# Altium PCB BOC1_06.PcbDoc (part 3 of 4)
Units mil, origin at the board's own origin, x right, y up, seen from the top; angles counter-clockwise.
Board outline 7900 x 6500 mil, 2 copper layers (Top Layer, Bottom Layer); 312 components, 413 nets, 1710 pads, 368 vias.
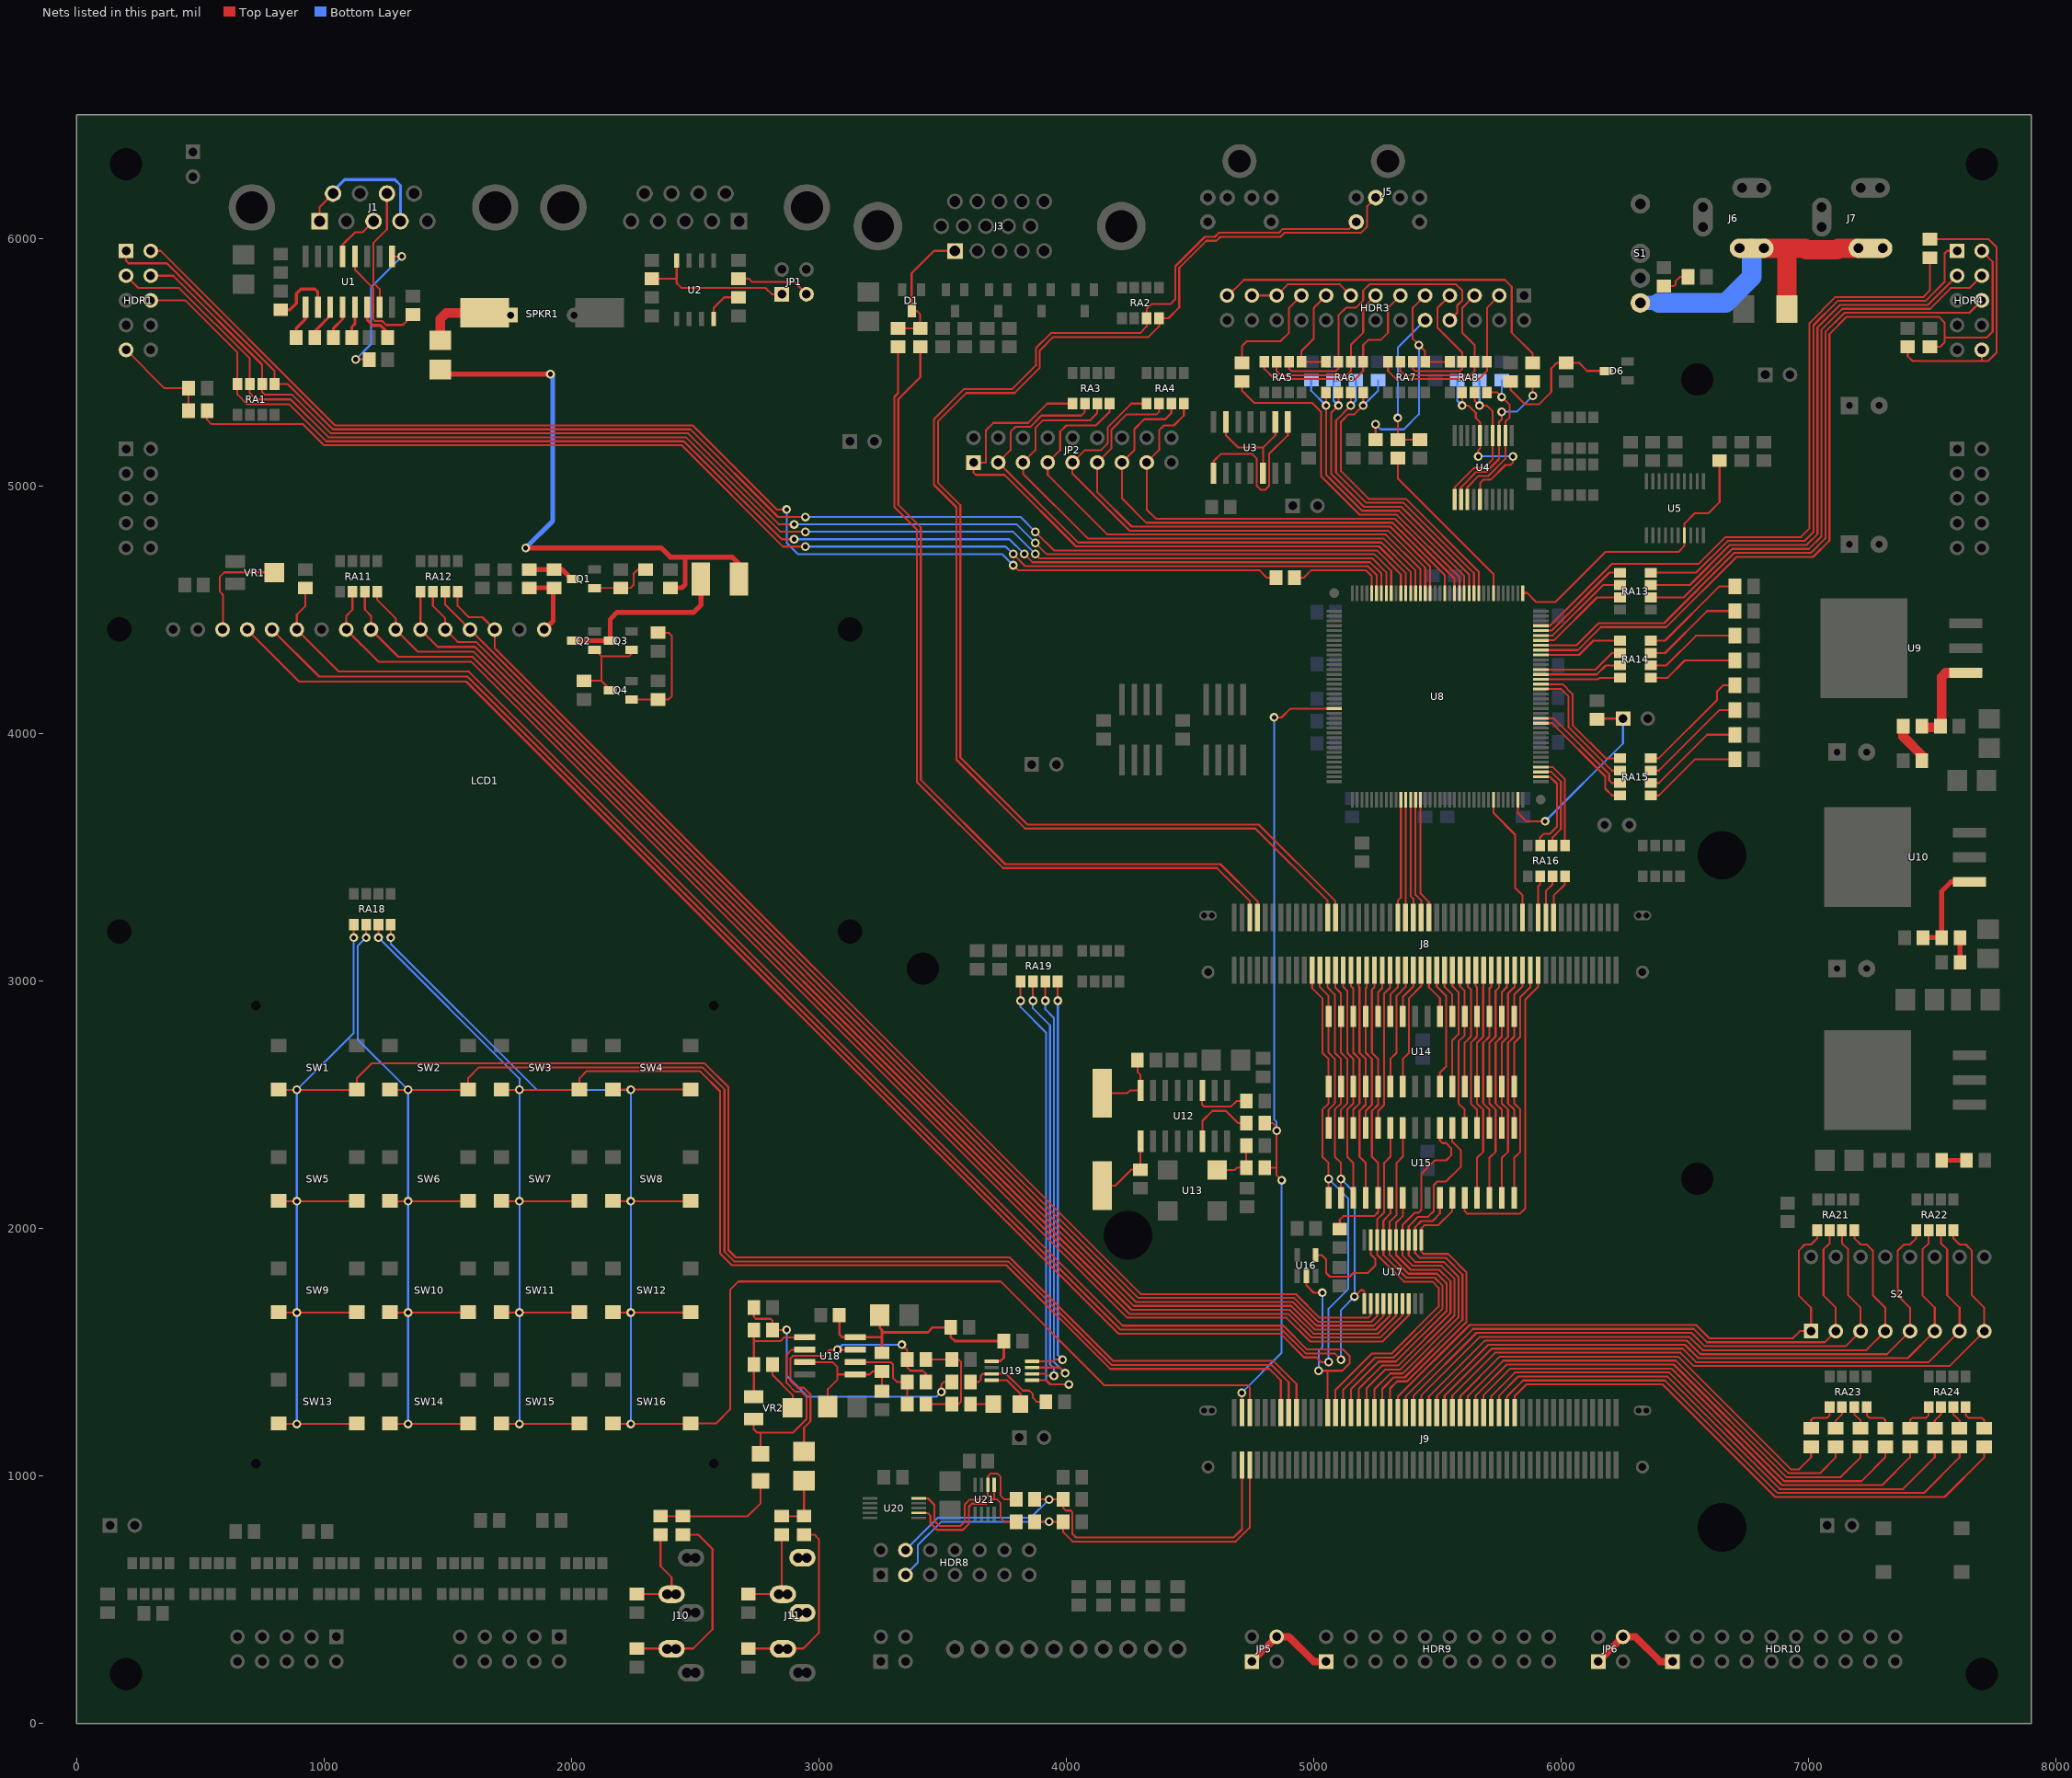
[diagram p3: the nets of this part, all layers, seen from the top]

## Via types
v1: diameter 35.43, hole 19.68, Top Layer to Bottom Layer, 194 vias
v2: diameter 35.43, hole 19.68, Top Layer to Bottom Layer, tented both sides, 169 vias
v3: diameter 50, hole 27.56, Top Layer to Bottom Layer, 5 vias

## Nets (pads, with @x,y where several pads share a name; then routed paths per layer and width w, separated by ;. In a path a pad name is that pad's centre, name@x,y a point inside that pad or via, vN(x,y) a via of type N, cw(c..) or ccw(c..) an arc to the next point about the centre after c; other vN are vias at no path point) (continued)
LCD_D1: LCD1.8 RA11.2 U17.8 | length 5740
  Top Layer w7.87: RA11.2@1115,4573 1115,4500 1090,4475 LCD1.8@1090,4420 1220,4290 1595,4290 4246,1639 4890.08,1639 4986.08,1543 5278,1543 5383.98,1648.98 U17.8@5383.98,1696.06
LCD_D2: LCD1.9 RA11.3 U17.7 | length 5601.5
  Top Layer w7.87: RA11.3@1165,4573 1165,4500 1190,4475 LCD1.9@1190,4420 1300,4310 1600,4310 4255,1655 4896.35,1655 4992.35,1559 5269,1559 5358.39,1648.39 U17.7@5358.39,1696.06
LCD_D3: LCD1.10 RA11.4 U17.6 | length 5483.7
  Top Layer w7.87: RA11.4@1215,4573 1215,4540 1290,4465 LCD1.10@1290,4420 1380,4330 1605,4330 4264,1671 4902.63,1671 4998.63,1575 5260,1575 5332.8,1647.8 U17.6@5332.8,1696.06
LCD_D4: LCD1.11 RA12.1 U17.5 | length 5314.2
  Top Layer w7.87: RA12.1@1390,4573 LCD1.11@1390,4420 1460,4350 1610,4350 4273,1687 4908.9,1687 5004.9,1591 5251,1591 5307.2,1647.2 U17.5@5307.2,1696.06
LCD_D5: LCD1.12 RA12.2 U17.4 | length 5196.4
  Top Layer w7.87: RA12.2@1440,4573 1440,4515 1490,4465 LCD1.12@1490,4420 1540,4370 1615,4370 4282,1703 4915.17,1703 5011.17,1607 5242,1607 5281.61,1646.61 U17.4@5281.61,1696.06
LCD_D6: LCD1.13 RA12.3 U17.3 | length 5078.6
  Top Layer w7.87: RA12.3@1490,4573 1490,4520 4291,1719 4921.44,1719 5017.44,1623 5233,1623 5256.02,1646.02 U17.3@5256.02,1696.06
LCD_D7: LCD1.14 RA12.4 U17.2 | length 5034.6
  Top Layer w7.87: RA12.4@1540,4573 1540,4515 1585,4470 1640,4470 LCD1.14@1690,4420 1690,4345 4300,1735 4927.71,1735 5023.71,1639 5220,1639 5230.43,1649.43 U17.2@5230.43,1696.06
LCD_E: J9.26 LCD1.6 R29.1 U16.2 | length 6425.3
  Top Layer w7.87: R29.1@925,4587.6 925,4515 890,4480 LCD1.6@890,4420 1060,4250 1585,4250 4228,1607 4877.54,1607 4973.54,1511 5119,1511 5145,1485 5145,1455 5115,1425 v2(5020,1425) ; U16.2@4970,1807.68 4970,1770 5000,1740 v1(5035,1740) ; J9.26@5056.3,1256.3 5056.3,1425
  Bottom Layer w7.87: v2(5020,1425) 5020,1505 5035,1520 v1(5035,1740)
LCD_EN: U16.4 U17.19 | length 440.3
  Top Layer w7.87: U16.4@5007.4,1892.32 5032.68,1892.32 5050,1875 5050,1820 5065,1805 5145,1805 5160,1820 5219,1820 5249,1850 5249,1876 5230.43,1894.57 U17.19@5230.43,1953.94
LED0: J9.60 LED0.1 | length 1801
  Top Layer w7.87: J9.60@5591.73,1256.3 5591.73,1321.73 5752,1482 6473,1482 6928,1027 6962,1027 7010,1075 LED0.1@7010,1117.6
LED0#: LED0.2 RA23.1 | length 148.9
  Top Layer w7.87: LED0.2@7010,1192.4 7010,1225 7020,1235 7075,1235 7085,1245 RA23.1@7085,1278
LED1: J9.62 LED1.1 | length 1870.4
  Top Layer w7.87: J9.62@5623.23,1256.3 5623.23,1323.23 5766,1466 6464,1466 6919,1011 7046,1011 7110,1075 LED1.1@7110,1117.6
LED1#: LED1.2 RA23.2 | length 96
  Top Layer w7.87: LED1.2@7110,1192.4 7110,1224 7135,1249 RA23.2@7135,1278
LED2: J9.64 LED2.1 | length 1939.8
  Top Layer w7.87: J9.64@5654.72,1256.3 5654.72,1324.72 5780,1450 6455,1450 6910,995 7130,995 7210,1075 LED2.1@7210,1117.6
LED2#: LED2.2 RA23.3 | length 96
  Top Layer w7.87: RA23.3@7185,1278 7185,1249 7210,1224 LED2.2@7210,1192.4
LED3: J9.66 LED3.1 | length 2009.2
  Top Layer w7.87: J9.66@5686.22,1256.3 5686.22,1326.22 5794,1434 6446,1434 6901,979 7214,979 7310,1075 LED3.1@7310,1117.6
LED3#: LED3.2 RA23.4 | length 148.9
  Top Layer w7.87: RA23.4@7235,1278 7235,1245 7245,1235 7300,1235 7310,1225 LED3.2@7310,1192.4
LED4: J9.68 LED4.1 | length 2075.6
  Top Layer w7.87: J9.68@5717.72,1256.3 5717.72,1322.72 5813,1418 6437,1418 6892,963 7298,963 7410,1075 LED4.1@7410,1117.6
LED4#: LED4.2 RA24.1 | length 148.9
  Top Layer w7.87: LED4.2@7410,1192.4 7410,1225 7420,1235 7475,1235 7485,1245 RA24.1@7485,1278
LED5: J9.70 LED5.1 | length 2145
  Top Layer w7.87: J9.70@5749.21,1256.3 5749.21,1324.21 5827,1402 6428,1402 6883,947 7382,947 7510,1075 LED5.1@7510,1117.6
LED5#: LED5.2 RA24.2 | length 96
  Top Layer w7.87: LED5.2@7510,1192.4 7510,1224 7535,1249 RA24.2@7535,1278
LED6: J9.72 LED6.1 | length 2211.5
  Top Layer w7.87: J9.72@5780.71,1256.3 5780.71,1320.71 5846,1386 6419,1386 6874,931 7466,931 7610,1075 LED6.1@7610,1117.6
LED6#: LED6.2 RA24.3 | length 96
  Top Layer w7.87: RA24.3@7585,1278 7585,1249 7610,1224 LED6.2@7610,1192.4
LED7: J9.74 LED7.1 | length 2280.8
  Top Layer w7.87: J9.74@5812.21,1256.3 5812.2,1322.21 5860,1370 6410,1370 6865,915 7550,915 7710,1075 LED7.1@7710,1117.6
LED7#: LED7.2 RA24.4 | length 148.9
  Top Layer w7.87: RA24.4@7635,1278 7635,1245 7645,1235 7700,1235 7710,1225 LED7.2@7710,1192.4
MASTER: R8.2 U8.103 | length 5097.2
  Top Layer w7.87: R8.2@527.4,5305 527.4,5267.6 545,5250 915,5250 1000,5165 2445,5165 2855,4755 v1(2945,4755) ; v1(3785,4725) 3834,4676 5219,4676 5253.94,4641.06 U8.103@5253.94,4567.32
  Bottom Layer w7.87: v1(2945,4755) 3755,4755 v1(3785,4725)
MASTER#: HDR1.9 R7.2 R8.1 | length 406.8
  Top Layer w7.87: HDR1.9@200,5550 355,5395 R7.2@452.6,5395 R8.1@452.6,5305
MASTER_MODE: HDR1.6 RA1.8 U8.102 | length 5609.4
  Top Layer w7.87: HDR1.6@300,5750 440,5750 650,5540 650,5370 690,5330 860,5330 1009,5181 2454,5181 2850,4785 v1(2900,4785) ; v1(3830,4725) 3863,4692 5228,4692 5273.62,4646.38 U8.102@5273.62,4567.32
  Bottom Layer w7.87: v1(2900,4785) 3770,4785 v1(3830,4725)
MASTER_TCK: HDR1.3 RA1.7 U8.101 | length 5756
  Top Layer w7.87: HDR1.3@200,5850 250,5800 415,5800 700,5515 700,5375 725,5350 865,5350 1018,5197 2463,5197 2845,4815 v1(2945,4815) ; v1(3875,4725) 3892,4708 5237,4708 5293.31,4651.69 U8.101@5293.31,4567.32
  Bottom Layer w7.87: v1(2945,4815) 3785,4815 v1(3875,4725)
MASTER_TDI: HDR1.1 RA1.5 U8.98 | length 5823.7
  Top Layer w7.87: HDR1.1@200,5950 200,5910 210,5900 365,5900 800,5465 RA1.5@800,5412 853,5412 1036,5229 2481,5229 2835,4875 v1(2945,4875) ; v1(3875,4815) 3950,4740 5255,4740 5352.36,4642.64 U8.98@5352.36,4567.32
  Bottom Layer w7.87: v1(2945,4875) 3815,4875 v1(3875,4815)
MASTER_TDO: HDR1.2 R36.1 | length 5173.4
  Top Layer w7.87: HDR1.2@300,5950 340,5950 1045,5245 2490,5245 2830,4905 v1(2870,4905) ; v1(3785,4680) 3805,4660 4780,4660 4810,4630 R36.1@4847.6,4630
  Bottom Layer w7.87: v1(2870,4905) 2870,4770 2915,4725 3740,4725 v1(3785,4680)
MASTER_TDO#: R36.2 U8.104 | length 402.7
  Top Layer w7.87: R36.2@4922.4,4630 4960,4630 4990,4660 5210,4660 5234.25,4635.75 U8.104@5234.25,4567.32
MASTER_TMS: HDR1.4 RA1.6 U8.100 | length 5661.3
  Top Layer w7.87: HDR1.4@300,5850 390,5850 750,5490 750,5380 760,5370 870,5370 1027,5213 2472,5213 2840,4845 v1(2900,4845) ; v1(3875,4770) 3921,4724 5246,4724 5312.99,4657.01 U8.100@5312.99,4567.32
  Bottom Layer w7.87: v1(2900,4845) 3800,4845 v1(3875,4770)
MODE: C85.1 RA6.4 U8.82 | length 1308.8
  Top Layer w7.87: RA6.4@5200,5378 v2(5200,5325) 5165,5290 5140,5290 5110,5260 5110,5060 5222,4948 5372,4948 5667.32,4652.68 U8.82@5667.32,4567.32
  Bottom Layer w7.87: v2(5200,5325) 5260,5385 C85.1@5260,5427.6
MODE_1: JP2.1 RA3.1 U8.97 | length 2611
  Top Layer w7.87: RA3.1@4025,5333 3923,5333 3845,5255 3705,5255 3675,5225 3675,5095 JP2.1@3625,5095 3625,5055 3635,5045 3750,5045 4039,4756 5264,4756 5372.05,4647.95 U8.97@5372.05,4567.32
MODE_2: JP2.3 RA3.2 U8.96 | length 2447.5
  Top Layer w7.87: RA3.2@4075,5333 4075,5300 4060,5285 3900,5285 3854,5239 3794,5239 3775,5220 3775,5145 JP2.3@3725,5095 4048,4772 5273,4772 5391.73,4653.27 U8.96@5391.73,4567.32
MODE_3: JP2.5 RA3.3 U8.95 | length 2358.4
  Top Layer w7.87: RA3.3@4125,5333 4125,5295 4095,5265 3905,5265 3875,5235 3875,5145 JP2.5@3825,5095 3825,5050 4087,4788 5282,4788 5411.42,4658.58 U8.95@5411.42,4567.32
MODE_4: JP2.7 RA3.4 U8.94 | length 2222.4
  Top Layer w7.87: RA3.4@4175,5333 4175,5300 4120,5245 4000,5245 3975,5220 3975,5145 JP2.7@3925,5095 3925,5045 4166,4804 5291,4804 5431.1,4663.9 U8.94@5431.1,4567.32
MODE_5: JP2.9 RA4.1 U8.93 | length 2167.1
  Top Layer w7.87: RA4.1@4325,5333 4263,5333 4167,5237 4167,5172 4140,5145 4075,5145 JP2.9@4025,5095 4025,5050 4255,4820 5300,4820 5450.79,4669.21 U8.93@5450.79,4567.32
MODE_6: JP2.11 RA4.2 U8.92 | length 2109
  Top Layer w7.87: RA4.2@4375,5333 4375,5300 4365,5290 4245,5290 4183,5228 4183,5153 JP2.11@4125,5095 4125,4975 4264,4836 5309,4836 5470.47,4674.53 U8.92@5470.47,4567.32
MODE_7: JP2.13 RA4.3 U8.89 | length 2021.5
  Top Layer w7.87: RA4.3@4425,5333 4425,5295 4400,5270 4315,5270 4275,5230 4275,5145 JP2.13@4225,5095 4225,4950 4323,4852 5318,4852 5529.53,4640.47 U8.89@5529.53,4567.32
MODE_8: JP2.15 RA4.4 U8.87 | length 1931.8
  Top Layer w7.87: RA4.4@4475,5333 4475,5285 4435,5245 4395,5245 4375,5225 4375,5145 JP2.15@4325,5095 4325,4905 4362,4868 5327,4868 5568.9,4626.1 U8.87@5568.9,4567.32
MOUSECLOCK: J5.5 J8.26 RA2.3 | length 5414.9
  Top Layer w7.87: J8.26@5056.3,3256.3 5056.3,3323.7 4764,3616 3834,3616 3556,3894 3556,4914 3465,5005 3465,5270 3587,5392 3782,5392 3877,5487 3877,5557 3938,5618 4298,5618 4325,5645 RA2.3@4325,5678 4325,5715 4345.07,5735.07 4421.07,5735.07 4440.5,5754.5 4440.5,5887.84 4559.66,6007 4600.27,6007 4616.27,6023 4859,6023 4874.75,6038.75 5143.87,6038.75 J5.5@5172.05,6066.93
MOUSEDATA: J5.1 J8.28 RA2.4 | length 5564.2
  Top Layer w7.87: J8.28@5087.79,3256.3 5087.79,3322.21 4778,3632 3843,3632 3572,3903 3572,4923 3481,5014 3481,5261 3596,5376 3791,5376 3893,5478 3893,5548 3947,5602 4332,5602 4375,5645 RA2.4@4375,5678 4413,5678 4456.24,5721.24 4456.24,5881.31 4565.93,5991 4606.54,5991 4622.54,6007 4865.27,6007 4881.27,6023 5190,6023 5216,6049 5216,6130.57 J5.1@5250.79,6165.35
N_TCK: C88.1 RA6.1 U8.85 | length 1257.2
  Top Layer w7.87: RA6.1@5050,5378 5050,5045 5195,4900 5345,4900 5608.27,4636.73 U8.85@5608.27,4567.32
  Bottom Layer w7.87: C88.1@4990,5427.6 4990,5385 v2(5050,5325)
N_TDI: C86.1 RA6.3 U8.83 | length 1265.3
  Top Layer w7.87: RA6.3@5150,5378 v2(5150,5325) 5090,5265 5090,5055 5213,4932 5363,4932 5647.64,4647.36 U8.83@5647.64,4567.32
  Bottom Layer w7.87: v2(5150,5325) 5170,5345 C86.1@5170,5427.6
N_TDO: R16.2 U8.86 | length 1444.7
  Top Layer w7.87: R16.2@4710,5422.6 4710,5385 4759,5336 4994,5336 5030,5300 5030,5040 5186,4884 5336,4884 5588.58,4631.42 U8.86@5588.58,4567.32
N_TDO#: HDR3.10 R16.1 | length 451.1
  Top Layer w7.87: R16.1@4710,5497.4 4710,5565 4730,5585 4865,5585 4900,5620 4900,5720 HDR3.10@4950,5770
N_TMS: C87.1 RA6.2 U8.84 | length 1253
  Top Layer w7.87: RA6.2@5100,5378 v2(5100,5325) 5070,5295 5070,5050 5204,4916 5354,4916 5627.95,4642.05 U8.84@5627.95,4567.32
  Bottom Layer w7.87: C87.1@5080,5427.6 5080,5345 v2(5100,5325)
N_TMS#: HDR3.17 RA5.6 RA6.7 | length 1178.6
  Top Layer w7.87: RA5.6@4900,5502 4900,5474 4910,5464 5090,5464 5100,5474 5100,5690 5130,5720 5170,5720 5200,5750 5200,5790 5225,5815 5575,5815 5600,5790 5600,5750 5580,5730 5580,5700 HDR3.17@5550,5670
NetC3_2: C3.2 U1.2 | length 273.6
  Top Layer w11.81: C3.2@825.1,5712.6 862.6,5712.6 888,5738 888,5777 907,5796 963,5796 975,5784 U1.2@975,5722.64
NetC6_1: C6.1 U1.1 | length 138.1
  Top Layer w11.81: C6.1@887.6,5600 887.6,5637.6 925,5675 U1.1@925,5722.64
NetC6_2: C6.2 U1.3 | length 148.6
  Top Layer w11.81: C6.2@962.4,5600 962.4,5625.1 1025,5687.7 U1.3@1025,5722.64
NetC7_1: C7.1 U1.4 | length 138.1
  Top Layer w11.81: C7.1@1037.6,5600 1037.6,5636.6 1075,5674 U1.4@1075,5722.64
NetC7_2: C7.2 U1.5 | length 127.9
  Top Layer w11.81: C7.2@1112.4,5600 1112.4,5642.4 1125,5655 U1.5@1125,5722.64
NetC8_1: C8.1 U1.6 | length 174.9
  Top Layer w11.81: U1.6@1175,5722.64 1175,5671 1197,5649 1227.95,5649 1257.4,5619.54 C8.1@1257.4,5600
NetC9_1: C9.1 C18.1 L1.2 | length 2315.7
  Top Layer w19.68: C9.1@1470,5470.95 1488.94,5452 v2(1915,5452) ; v2@1815.57,4750 2362.57,4750 2399.57,4713 2648.57,4713 2678.35,4683.23 L1.2@2678.35,4626.57 ; C18.1@2401.48,4588.6 2446.17,4588.6 2459.57,4602 2459.57,4703
  Bottom Layer w19.68: v2@1815.57,4750 1924.6,4859.02 1924.6,5442.4 v2(1915,5452)
  other v2: 1815,4750
NetC9_2: C9.2 SPKR1.1 SPKR1.1A | length 276.6
  Top Layer w39.37: C9.2@1470,5589.06 1470,5675 1494,5700 SPKR1.1@1650,5700
NetC28_1: C28.1 CR1.1 U12.16 | length 287.1
  Top Layer w7.87: CR1.1@4145,2547.01 4247.01,2547.01 4257.36,2557.36 U12.16@4300,2557.36 4300,2620 4287.6,2632.4 C28.1@4287.6,2680
NetC31_1: C31.1 CR1.2 U12.1 | length 296.9
  Top Layer w7.87: CR1.2@4145,2172.99 4197.99,2172.99 4262.4,2237.4 C31.1@4300,2237.4 U12.1@4300,2352.64
NetC36_1: C36.1 R60.2 R67.1 | length 1144
  Top Layer w7.87: C36.1@2737.6,1680 2737.6,1642.4 2745,1635 2805,1635 2812.4,1627.6 R60.2@2812.4,1590 v1(2870,1590) ; v1(3495,1340) 3495,1370 3505,1380 R67.1@3537.6,1380
  Bottom Layer w7.87: v1(2870,1590) 2870,1405 2955,1320 3475,1320 v1(3495,1340)
NetC37_2: C37.2 C38.1 C42.1 R61.2 R63.2 U18.8 U19.1 | length 1079.8
  Top Layer w9.84: C37.2@3082.4,1650 3082.4,1572.6 3095,1560 3255,1560 ; C38.1@3245.95,1650 3245.95,1599.05 3255,1590 R63.2@3255,1497.4 ; 3255,1580 3440,1580 3460,1600 R61.2@3532.6,1600 3532.6,1562.4 3550,1545 C42.1@3747.6,1545 3747.6,1477.6 3733.39,1463.39 U19.1@3698.31,1463.39
NetC39_1: C39.1 R63.1 R65.2 U18.3 U18.5 | length 582.2
  Top Layer w7.87: U18.3@2942.64,1460 3055,1460 3075,1440 3075,1390 3035.95,1350.95 C39.1@3035.95,1280 ; 3075,1410 3205,1410 3217.6,1422.6 R63.1@3255,1422.6 R65.2@3255,1342.4
NetC40_1: C40.1 R66.2 U18.6 | length 365.6
  Top Layer w7.87: U18.6@3147.36,1460 3290,1460 3300,1450 3300,1395 3315,1380 C40.1@3357.6,1380 R66.2@3357.6,1290
NetC40_2: C40.2 C46.1 R64.1 U18.7 | length 1199.7
  Top Layer w7.87: C46.1@2940,1099.05 2940,1195 2966,1221 2966,1329 2939,1356 2914,1356 2885,1385 2885,1475 2895,1485 3020,1485 3045,1510 U18.7@3147.36,1510 ; v1(3335,1530) 3357.6,1507.4 3357.6,1437.4 3370,1425 3420,1425 3432.4,1412.6 C40.2@3432.4,1380
  Bottom Layer w7.87: v1(3075,1510) 3095,1530 v1(3335,1530)
NetC41_1: C41.1 R64.2 R66.1 R68.1 | length 453.5
  Top Layer w7.87: R66.1@3432.4,1290 3565,1290 3575,1300 3575,1460 3565,1470 R64.2@3432.4,1470
NetC43_1: C43.1 R68.2 | length 92.5
  Top Layer w7.87: R68.2@3612.4,1290 C43.1@3704.88,1290
NetC43_2: C43.2 U19.4 | length 180.8
  Top Layer w7.87: U19.4@3698.31,1386.61 3759.39,1386.61 3815.12,1330.88 C43.2@3815.12,1290
NetC44_1: C44.1 R67.2 U19.3 | length 382.6
  Top Layer w7.87: R67.2@3612.4,1380 3645,1380 3655,1390 3655,1405 3662.2,1412.2 3756.8,1412.2 3824,1345 3850,1345 3865,1330 3865,1315 3880,1300 C44.1@3917.6,1300
NetC45_1: C45.1 R71.2 R72.2 | length 516.7
  Top Layer w7.87: R71.2@2360,837.4 2712.4,837.4 2765,890 C45.1@2765,979.88
NetC45_2: C45.2 U18.2 VR2.CCW | length 757.6
  Top Layer w7.87: VR2.CCW@2736.26,1229.72 2736.26,1188.74 2750,1175 2895,1175 2950,1230 2950,1320 2930,1340 2905,1340 2869,1376 2869,1489 2890,1510 U18.2@2942.64,1510 ; C45.2@2765,1090.12 2765,1175
NetC46_2: C46.2 R73.2 R74.2 | length 233.5
  Top Layer w7.87: R73.2@2850,837.4 R74.2@2940,837.4 C46.2@2940,980.94
NetC50_1: C50.1 J10.4 J10.4A J10.4B R71.1 | length 398.4
  Top Layer w7.87: C50.1@2265,522.4 2404.72,522.4 2404.72,590.28 2360,635 R71.1@2360,762.6
NetC51_1: C51.1 J10.2 J10.2A J10.2B R72.1 | length 806.1
  Top Layer w7.87: C51.1@2265,302.4 2492.6,302.4 2570,380 2570,705 2512.4,762.6 R72.1@2450,762.6
NetC52_1: C52.1 J11.4 J11.4A J11.4B R73.1 | length 375.2
  Top Layer w7.87: C52.1@2715,522.4 2850,522.4 R73.1@2850,762.6
NetC53_1: C53.1 J11.2 J11.2A J11.2B R74.1 | length 758.2
  Top Layer w7.87: C53.1@2715,302.4 2937.4,302.4 3000,365 3000,745 2982.4,762.6 R74.1@2940,762.6
NetD6_3: D6.3 R17.2 R19.1 | length 582.6
  Top Layer w7.87: R17.2@5795,5422.6 5795,5390 5855,5330 5910,5330 5960,5380 5960,5475 5982.4,5497.4 6072.6,5497.4 6105,5465 D6.3@6181.69,5465
NetJ1_1: J1.1 J1.4 J1.6 | length 590.3
  Top Layer w7.87: J1.1@981.89,6070.08 981.89,6127.36 J1.6@1036.42,6181.89
  Bottom Layer w11.81: J1.6@1036.42,6181.89 1036.42,6191.42 1083,6238 1286,6238 1309.05,6214.95 J1.4@1309.05,6070.08
NetJ11_3: J11.3 J11.3A J11.3B
NetJ11_5: J11.5 J11.5A J11.5B
NetJP1_1: JP1.1 R2.2 U2.8 | length 634.9
  Top Layer w7.87: R2.2@2325,5837.6 2425,5837.6 ; U2.8@2425,5911.22 2425,5820 2445,5800 2785,5800 2810,5775 JP1.1@2850,5775
NetJP1_3: JP1.3 R3.1 | length 300.9
  Top Layer w7.87: R3.1@2675,5837.6 2717.4,5837.6 2730,5825 2900,5825 JP1.3@2950,5775
NetL1_1: L1.1 Q2.3 Q3.3 | length 733.4
  Top Layer w19.68: Q2.3@2006.69,4375 Q3.3@2156.69,4375 2156.69,4461.69 2185,4490 2495,4490 2523.23,4518.23 L1.1@2523.23,4625
NetLCD1_3: LCD1.3 VR1.W | length 446.8
  Top Layer w7.87: LCD1.3@591.53,4419.9 591.53,4561 578.23,4574.31 578.23,4632.65 596.85,4651.28 VR1.W@799.06,4651.28
NetLCD1_16: LCD1.16 R32.1 R33.1 | length 283.2
  Top Layer w19.68: R32.1@1826.47,4588.6 1926.47,4588.6 1926.47,4454.84 LCD1.16@1891.54,4419.9
NetLED8_1: LED8.1 R5.2 | length 120.7
  Top Layer w7.87: R5.2@6415,5807.6 6455.6,5807.6 6462,5814 6462,5827 6480,5845 LED8.1@6512.6,5845
NetQ1_1: Q1.1 R34.2 R35.2 | length 265.5
  Top Layer w7.87: Q1.1@2093.31,4587.6 2239.17,4588.6 2251.57,4601 2251.57,4646 2268.97,4663.4 R35.2@2301.48,4663.4
NetQ1_3: Q1.3 R32.2 R33.2 | length 184.1
  Top Layer w19.68: R32.2@1830,4662.4 R33.2@1930,4662.4 1961.17,4663.4 Q1.3@1998.57,4626
NetQ2_1: Q2.1 Q3.1 Q4.3 R38.2 | length 387.1
  Top Layer w7.87: R38.2@2051.47,4213.4 2120.87,4213.4 ; Q2.1@2094.88,4338.6 2120.87,4312.61 ; Q4.3@2158.27,4176 2120.87,4213.4 ; Q3.1@2244.88,4324.31 2233.19,4312.61 2120.87,4312.61 ; 2120.87,4213.4 2120.87,4312.61
NetQ4_1: Q4.1 R37.2 R39.1 | length 472
  Top Layer w7.87: Q4.1@2243.31,4137.6 2392.6,4137.6 2405,4150 2405,4395 2392.6,4407.4 R37.2@2350,4407.4
NetR1_2: R1.2 U1.12 | length 471.3
  Top Layer w7.87: U1.12@1125,5927.36 1125,5873.73 1198.62,5800.11 1198.62,5675.38 1207,5667 1235,5667 1251,5651 1318.5,5651 R1.2@1360.1,5692.6
NetR4_2: R4.2 U2.4 | length 162.6
  Top Layer w7.87: U2.4@2575,5675 2575,5720 2617.4,5762.4 R4.2@2675,5762.4
NetR9_2: R9.2 U1.9 | length 584.8
  Top Layer w7.87: v2(1128,5512) R9.2@1180.5,5512 ; U1.9@1275,5927.36 v2(1314.64,5927.36)
  Bottom Layer w7.87: v2(1128,5512) 1190,5574 1190,5802.73 v2(1314.64,5927.36)
NetR41_1: R41.1 R42.2 U9.1 | length 377.5
  Top Layer w39.37: R41.1@7457.4,4024.9 R42.2@7532.6,4024.9 ; R42.2@7537.6,4029.9 7537.6,4227.6 7555,4245 U9.1@7635,4245
NetR41_2: R41.2 R43.1 | length 173.1
  Top Layer w39.37: R41.2@7382.6,4030 7382.6,3987.4 7460,3910 7460,3892.6 R43.1@7457.4,3890
NetR47_2: R47.2 R48.1 U10.1 | length 390.6
  Top Layer w19.68: R47.2@7462.4,3175.1 7537.6,3175.1 7537.6,3362.6 7575,3400 U10.1@7650,3400
NetR48_2: R48.2 R49.2 | length 100
  Top Layer w19.68: R49.2@7612.4,3075 R48.2@7612.4,3175
NetR51_1: R51.1 U12.11 | length 247
  Top Layer w7.87: U12.11@4549,2557.36 4549,2500 4556,2493 4667,2493 4689.1,2515.1 R51.1@4726.6,2515.1
NetR52_1: R52.1 U12.6 | length 297.2
  Top Layer w7.87: U12.6@4550,2352.64 4550,2435 4590,2475 4645,2475 4695,2425 R52.1@4727.6,2425
NetR53_1: R53.1 R54.1 U13.3 | length 210.3
  Top Layer w7.87: U13.3@4610,2236.1 4680.1,2236.1 4689.1,2245.1 4726.6,2245.1 R53.1@4726.6,2335.1
NetR57_2: R57.2 R58.1 | length 100.2
  Top Layer w19.68: R57.2@7537.4,2275.1 R58.1@7637.6,2275.1
NetR60_1: R60.1 R62.2 U18.1 VR2.CW | length 481.3
  Top Layer w7.87: VR2.CW@2737.6,1320 R60.1@2737.6,1590 ; 2737.6,1545 2845,1545 2860,1560 U18.1@2942.64,1560
NetR62_1: R62.1 VR2.W | length 208.7
  Top Layer w7.87: R62.1@2812.4,1450 2812.4,1407.6 2893.74,1326.26 VR2.W@2893.74,1275
NetRA19_1: RA19.1 U19.5 | length 1907.9
  Top Layer w7.87: v1(3815,2920) RA19.1@3815,2998 ; U19.5@3861.69,1386.61 3918.39,1386.61 3935,1370 v1(4010,1370)
  Bottom Layer w7.87: v1(3815,2920) 3815,2895 3918.5,2791.5 3918.5,1386.5 3935,1370 v1(4010,1370)
NetRA19_2: RA19.2 U19.6 | length 1729.5
  Top Layer w7.87: U19.6@3861.69,1412.2 3917.8,1412.2 3925,1405 v1(3950,1405) ; v1@3865,2910 RA19.2@3865,2998
  Bottom Layer w7.87: v1(3865,2920) 3865,2890 3934.25,2820.75 3934.25,1450.75 3950,1435 v1(3950,1405)
NetRA19_3: RA19.3 U19.7 | length 1758.9
  Top Layer w7.87: U19.7@3861.69,1437.8 3972.2,1437.8 v1(3995,1415) ; v1(3915,2920) RA19.3@3915,2998
  Bottom Layer w7.87: v1(3915,2920) 3915,2885 3950,2850 3950,1460 v1(3995,1415)
NetRA19_4: RA19.4 U19.8 | length 1662.3
  Top Layer w7.87: U19.8@3861.69,1463.39 3948.39,1463.39 3955,1470 v1(3985,1470) ; v1(3965,2920) RA19.4@3965,2998
  Bottom Layer w7.87: v1(3965,2920) 3965.75,2919.25 3965.75,1489.25 v1(3985,1470)
NetU3_1: U3.1 U3.8 | length 705.9
  Top Layer w7.87: U3.8@4595,5051.65 4595,5100 4625,5130 4750,5130 4770,5110 4770,5000 4785,4985 4805,4985 4820,5000 4820,5130 4895,5205 U3.1@4895,5258.35
NetU3_2: U3.2 U3.6 U3.12 | length 451.5
  Top Layer w7.87: U3.6@4645,5258.35 4645,5205 4695,5155 4795,5155 ; U3.12@4795,5051.65 4795,5155 ; U3.2@4845,5258.35 4845,5205 4795,5155
NEXUS_TCK: J8.82 RA16.3 | length 177.8
  Top Layer w7.87: J8.82@5938.19,3256.3 5938.19,3363.19 5965,3390 RA16.3@5965,3423
NEXUS_TCK#: RA16.6 U8.39 | length 370.9
  Top Layer w7.87: U8.39@5917.32,3844.88 5960.12,3844.88 5999,3806 5999,3614 5965,3580 RA16.6@5965,3547
NEXUS_TDI: J8.84 RA16.4 | length 185.5
  Top Layer w7.87: J8.84@5969.69,3256.3 5969.69,3344.69 6015,3390 RA16.4@6015,3423
NEXUS_TDI#: RA16.5 U8.40 | length 386.2
  Top Layer w7.87: U8.40@5917.32,3864.57 5965.43,3864.57 6015,3815 RA16.5@6015,3547
NEXUS_TDO: J8.76 U8.30 | length 525
  Top Layer w7.87: U8.30@5726.38,3732.68 5726.38,3678.62 5814,3591 5814,3376 5843.7,3346.3 J8.76@5843.7,3256.3
NEXUS_TMS: J8.80 RA16.2 | length 170.1
  Top Layer w7.87: J8.80@5906.69,3256.3 5906.69,3381.69 5915,3390 RA16.2@5915,3423
NEXUS_TMS#: RA16.7 U8.38 | length 370.2
  Top Layer w7.87: RA16.7@5915,3547 5915,3580 5930,3595 5955,3595 5983,3623 5983,3797 5954.8,3825.2 U8.38@5917.32,3825.2
PAR_TCK: C82.1 RA8.3 U4.4 U4.11 | length 669.5
  Top Layer w7.87: U4.11@5569.84,4946.06 5569.84,4994.84 5648,5073 5688,5073 5723.39,5108.39 5723.39,5301.61 5700,5325 v2(5670,5325) 5650,5345 RA8.3@5650,5378
  Bottom Layer w7.87: v2(5670,5325) C82.1@5670,5427.6
PAR_TDI: C81.1 RA8.4 U4.2 U4.13 | length 656.5
  Top Layer w7.87: U4.13@5621.02,4946.06 5621.02,4996.02 5666,5041 5706,5041 5774.57,5109.57 5774.57,5259.57 5792,5277 5792,5328 5742,5378 RA8.4@5700,5378
  Bottom Layer w7.87: v2(5760,5360) C81.1@5760,5427.6
PAR_TDO: R18.2 U4.3 U4.12 | length 655.1
  Top Layer w7.87: U4.12@5595.43,4946.06 5595.43,4995.43 5657,5057 5697,5057 5748.98,5108.98 5748.98,5258.98 5760,5270 v2(5760,5300) ; v2(5885,5365) R18.2@5885,5422.6
  Bottom Layer w7.87: v2(5760,5300) 5820,5300 v2(5885,5365)
PAR_TDO#: HDR3.13 R18.1 | length 1532.6
  Top Layer w7.87: HDR3.13@4650,5765 4718,5833 5772,5833 5800,5805 5800,5620 5885,5535 R18.1@5885,5497.4
PAR_TMS: C83.1 RA8.2 U4.6 U4.15 | length 814.7
  Top Layer w7.87: RA8.2@5600,5378 v2(5600,5325) 5625,5325 5655,5295 5655,5275 5672.2,5257.8 5672.2,5152.2 5665,5145 v2(5665,5120) ; U4.15@5672.2,4946.06 5672.2,5012.2 5685,5025 5715,5025 5775,5085 5795,5085 5805,5095 v2(5805,5120)
  Bottom Layer w7.87: C83.1@5580,5427.6 5580,5345 v2(5600,5325) ; v2(5665,5120) v2(5805,5120)
PARALLEL: R23.2 U8.79 | length 705.3
  Top Layer w7.87: R23.2@5340,5112.6 5340,5030 5726.38,4643.62 U8.79@5726.38,4567.32
PARALLEL#: HDR3.18 R23.1 R24.1 | length 613.2
  Top Layer w7.87: v2@5340,5270 R23.1@5340,5187.4 R24.1@5430,5187.4
  Bottom Layer w7.87: v2(5340,5275) 5340,5560 HDR3.18@5450,5670
PROGRAM: R25.2 U5.7 U8.73 | length 1195.8
  Top Layer w7.87: U8.73@5844.49,4567.32 5862.68,4567.32 5899,4531 5976,4531 6179,4734 6474,4734 6498.39,4758.39 6498.39,4848.39 6540,4890 6595,4890 6640,4935 R25.2@6640,5100.2
PU0: HDR3.2 RA7.8 RA8.5 | length 790
  Top Layer w7.87: RA7.8@5300,5502 5300,5465 5333,5432 5667,5432 5700,5465 5700,5720 HDR3.2@5750,5770
PU1: HDR3.3 RA7.7 RA8.6 | length 697.5
  Top Layer w7.87: RA7.7@5350,5502 5350,5465 5367,5448 5633,5448 5650,5465 5650,5570 5600,5620 5600,5720 HDR3.3@5650,5770
PU2: HDR3.4 RA7.6 RA8.7 | length 594.4
  Top Layer w7.87: RA7.6@5400,5502 5400,5474 5410,5464 5590,5464 5600,5474 5600,5540 5500,5640 5500,5720 HDR3.4@5550,5770
PU3: HDR3.5 R22.1 RA7.5 RA8.8 | length 961
  Top Layer w7.87: R22.1@5250,5187.4 v2(5250,5250) ; HDR3.5@5450,5770 5400,5720 5400,5595 5450,5545 RA7.5@5450,5502 RA8.8@5550,5502
  Bottom Layer w7.87: v2(5250,5250) 5271,5229 5364,5229 5425,5290 v2(5425,5570)
PU4: HDR3.6 RA5.8 RA6.5 | length 855.5
  Top Layer w7.87: RA5.8@4800,5502 4800,5474 4842,5432 5167,5432 5200,5465 5200,5570 5220,5590 5270,5590 5300,5620 5300,5720 HDR3.6@5350,5770
PU5: HDR3.7 RA5.7 RA6.6 | length 697.5
  Top Layer w7.87: RA5.7@4850,5502 4850,5465 4867,5448 5133,5448 5150,5465 5150,5570 5200,5620 5200,5720 HDR3.7@5250,5770
PU6#: HDR3.8 HDR3.11 HDR3.12 | length 437.3
  Top Layer w7.87: HDR3.12@4750,5770 HDR3.11@4850,5770 4895,5815 5105,5815 HDR3.8@5150,5770
PU7: HDR3.9 RA5.5 RA6.8 | length 409.4
  Top Layer w7.87: RA6.8@5050,5502 RA5.5@4950,5502 4950,5545 5000,5595 5000,5720 HDR3.9@5050,5770
PWR_IN: D7.2 J6.1 J6.1A J6.1B J7.1 J7.1A J7.1B S1.3 | length 1241
  Top Layer w78.74: J6.1B@6819.21,5960.63 6984.37,5960.63 6990,5955 7115,5955 7120.63,5960.63 J7.1A@7200.79,5960.63 ; D7.2@6912.5,5715 6912.5,5960.63
  Bottom Layer w59.06: S1.3@6320,5740 6395,5740
  Bottom Layer w78.74: 6395,5740 6665,5740 6770,5845 J6.1@6770,5960.63
PWR_USER_1: HDR9.1 JP5.1 JP5.4 | length 382.8
  Top Layer w29.53: JP5.1@4750,250 JP5.4@4850,350 4900,350 5000,250 HDR9.1@5050,250
PWR_USER_2: HDR10.1 JP6.1 JP6.4 | length 382.8
  Top Layer w29.53: JP6.1@6150,250 JP6.4@6250,350 6300,350 6400,250 HDR10.1@6450,250
RAM0_DATA0: J9.42 U15.11 U17.11 | length 1236.7
  Top Layer w7.87: J9.42@5308.27,1256.3 5308.27,1353.27 5337,1382 5377,1382 5617,1622 5617,1823 5543,1897 5443,1897 5435.16,1904.84 5435.16,2001.16 5447,2013 5503,2013 5560,2070 U15.11@5560,2123.27
RAM0_DATA1: J9.40 U15.10 U17.12 | length 1236.4
  Top Layer w7.87: J9.40@5276.77,1256.3 5276.77,1351.77 5323,1398 5368,1398 5601,1631 5601,1814 5534,1881 5429,1881 5409.57,1900.43 5409.57,2004.57 5435,2030 5480,2030 5510,2060 U15.10@5510,2123.27
RAM0_DATA2: J9.38 U15.22 U17.13 | length 1616.9
  Top Layer w7.87: J9.38@5245.28,1256.3 5245.28,1350.28 5309,1414 5359,1414 5585,1640 5585,1805 5525,1865 5410,1865 5383.98,1891.02 5383.98,2008.98 5422,2047 5462,2047 5485,2070 5485,2175 5500,2190 5535,2190 5595,2250 5595,2315 5560,2350 U15.22@5560,2406.73
RAM0_DATA3: J9.36 U15.23 U17.14 | length 1631.3
  Top Layer w7.87: J9.36@5213.78,1256.3 5213.78,1353.78 5290,1430 5350,1430 5569,1649 5569,1796 5516,1849 5401,1849 5358.39,1891.61 5358.39,2013.39 5409,2064 5424,2064 5435,2075 5435,2220 5490,2275 5535,2275 5555,2295 5555,2325 5535,2345 5520,2345 5510,2355 U15.23@5510,2406.73
RAM0_DATA4: J9.34 U15.7 U17.15 | length 1228.4
  Top Layer w7.87: J9.34@5182.28,1256.3 5182.28,1352.28 5276,1446 5341,1446 5553,1658 5553,1787 5507,1833 5392,1833 5332.8,1892.2 5332.8,2022.8 5360,2050 U15.7@5360,2123.27
RAM0_DATA5: J9.32 U15.26 U17.16 | length 1535.8
  Top Layer w7.87: J9.32@5150.79,1256.3 5150.79,1350.79 5262,1462 5332,1462 5537,1667 5537,1778 5498,1817 5383,1817 5307.2,1892.8 5307.2,2027.2 5335,2055 5335,2265 5360,2290 U15.26@5360,2406.73
RAM0_DATA6: J9.30 U15.6 U17.17 | length 1255.6
  Top Layer w7.87: J9.30@5119.29,1256.3 5119.29,1349.29 5248,1478 5323,1478 5521,1676 5521,1769 5489,1801 5374,1801 5281.61,1893.39 5281.61,2031.61 5310,2060 U15.6@5310,2123.27
RAM0_DATA7: J9.28 U15.27 U17.18 | length 1563
  Top Layer w7.87: J9.28@5087.79,1256.3 5087.79,1347.79 5234,1494 5314,1494 5505,1685 5505,1760 5480,1785 5365,1785 5256.02,1893.98 5256.02,2036.02 5285,2065 5285,2265 5310,2290 U15.27@5310,2406.73
RAM0_OE: J8.41 U15.28 | length 657
  Top Layer w7.87: U15.28@5260,2406.73 5260,2475 5285,2500 5285,2950 5308.27,2973.27 J8.41@5308.27,3043.7
RAM0_WE: J8.79 U15.12 | length 1295.2
  Top Layer w7.87: U15.12@5610,2123.27 5610,2070 5620,2060 5834,2060 5855,2081 5855,2925 5906.69,2976.69 J8.79@5906.69,3043.7
RAM1_DATA0: J8.45 U14.6 | length 495.8
  Top Layer w7.87: U14.6@5310,2573.27 5310,2685 5335,2710 5335,2940 5371.26,2976.26 J8.45@5371.26,3043.7
RAM1_DATA1: J8.49 U14.7 | length 501.2
  Top Layer w7.87: U14.7@5360,2573.27 5360,2685 5385,2710 5385,2930 5434.25,2979.25 J8.49@5434.25,3043.7
RAM1_DATA2: J8.53 U14.10 | length 496.4
  Top Layer w7.87: J8.53@5497.24,3043.7 5497.24,2977.76 5535,2940 5535,2655 5510,2630 U14.10@5510,2573.27
RAM1_DATA3: J8.57 U14.11 | length 491
  Top Layer w7.87: U14.11@5560,2573.27 5560,2760 5585,2785 5585,2955 5560.24,2979.76 J8.57@5560.24,3043.7
RAM1_DATA4: J8.55 U14.22 | length 199.9
  Top Layer w7.87: J8.55@5528.74,3043.7 5528.74,2976.26 5560,2945 U14.22@5560,2856.73
RAM1_DATA5: J8.51 U14.23 | length 205.3
  Top Layer w7.87: J8.51@5465.75,3043.7 5465.75,2974.25 5510,2930 U14.23@5510,2856.73
RAM1_DATA6: J8.47 U14.26 | length 204.7
  Top Layer w7.87: U14.26@5360,2856.73 5360,2935 5402.76,2977.76 J8.47@5402.76,3043.7
RAM1_DATA7: J8.43 U14.27 | length 199.3
  Top Layer w7.87: U14.27@5310,2856.73 5310,2945 5339.76,2974.76 J8.43@5339.76,3043.7
RAM1_OE: J8.39 U14.28 | length 193.9
  Top Layer w7.87: U14.28@5260,2856.73 5260,2955 5276.77,2971.77 J8.39@5276.77,3043.7
RAM1_WE: J8.61 U14.12 | length 485.7
  Top Layer w7.87: U14.12@5610,2573.27 5610,2750 5635,2775 5635,2965 5623.23,2976.77 J8.61@5623.23,3043.7
RAM_ADDR0: J8.21 LCD1.4 U14.1 U15.1 | length 7371.1
  Top Layer w7.87: LCD1.4@690,4420 900,4210 1575,4210 4210,1575 4865,1575 4961,1479 5011,1479 5030,1460 v2(5060,1460) ; J8.21@4993.31,3043.7 4993.31,2971.69 5035,2930 5035,2710 5060,2685 5060,2505 5035,2480 5035,2290 5060,2265 U15.1@5060,2123.27
  Bottom Layer w7.87: v2(5060,1460) 5060,1676 5140,1756 5140,2120 v2(5060,2200)
RAM_ADDR1: J8.25 LCD1.5 U14.2 U15.2 U17.1 | length 7382.2
  Top Layer w7.87: LCD1.5@790,4420 980,4230 1580,4230 4219,1591 4871.27,1591 4967.27,1495 5085,1495 v2(5110,1470) ; J8.25@5056.3,3043.7 5056.3,2973.7 5085,2945 5085,2710 5110,2685 5110,2505 5085,2480 5085,2290 5110,2265 U15.2@5110,2123.27 ; v2(5165,1725) 5190,1750 5200,1750 5204.84,1745.16 U17.1@5204.84,1696.06
  Bottom Layer w7.87: v2(5110,1470) 5110,1670 v2(5165,1725) 5165,2145 v2(5110,2200)
RAM_ADDR2: J8.29 U14.3 U15.3 | length 958
  Top Layer w7.87: J8.29@5119.29,3043.7 5119.29,2975.71 5135,2960 5135,2710 5160,2685 5160,2505 5135,2480 5135,2290 5160,2265 U15.3@5160,2123.27
RAM_ADDR3: J8.33 U14.4 U15.4 | length 952.6
  Top Layer w7.87: J8.33@5182.28,3043.7 5182.28,2977.72 5185,2975 5185,2710 5210,2685 5210,2500 5185,2475 5185,2290 5210,2265 U15.4@5210,2123.27
RAM_ADDR4: J8.65 U14.13 U15.13 | length 952
  Top Layer w7.87: U15.13@5660,2123.27 5660,2285 5685,2310 5685,2480 5660,2505 5660,2750 5685,2775 5685,2975 5686.22,2976.22 J8.65@5686.22,3043.7
RAM_ADDR5: J8.69 U14.14 U15.14 | length 957.4
  Top Layer w7.87: U15.14@5710,2123.27 5710,2285 5735,2310 5735,2480 5710,2505 5710,2750 5735,2775 5735,2960 5749.21,2974.21 J8.69@5749.21,3043.7
RAM_ADDR6: J8.73 U14.15 U15.15 | length 962.8
  Top Layer w7.87: U15.15@5760,2123.27 5760,2285 5785,2310 5785,2480 5760,2505 5760,2750 5785,2775 5785,2950 5812.2,2977.21 J8.73@5812.21,3043.7
RAM_ADDR7: J8.77 U14.16 U15.16 | length 968.1
  Top Layer w7.87: U15.16@5810,2123.27 5810,2285 5835,2310 5835,2480 5810,2505 5810,2750 5835,2775 5835,2935 5875.2,2975.2 J8.77@5875.2,3043.7
RAM_ADDR8: J8.75 U14.17 U15.17 | length 671.6
  Top Layer w7.87: U15.17@5810,2406.73 5810,2480 5785,2505 5785,2750 5810,2775 5810,2945 5843.7,2978.7 J8.75@5843.7,3043.7
RAM_ADDR9: J8.71 U14.18 U15.18 | length 666.3
  Top Layer w7.87: U15.18@5760,2406.73 5760,2480 5735,2505 5735,2750 5760,2775 5760,2955 5780.71,2975.71 J8.71@5780.71,3043.7
RAM_ADDR10: J8.67 U14.19 U15.19 | length 660.9
  Top Layer w7.87: U15.19@5710,2406.73 5710,2480 5685,2505 5685,2750 5710,2775 5710,2970 5717.72,2977.72 J8.67@5717.72,3043.7
RAM_ADDR11: J8.63 U14.20 U15.20 | length 659.9
  Top Layer w7.87: J8.63@5654.72,3043.7 5654.72,2980.28 5660,2975 5660,2775 5635,2750 5635,2505 5660,2480 U15.20@5660,2406.73
RAM_ADDR12: J8.59 U14.21 U15.21 | length 665.2
  Top Layer w7.87: J8.59@5591.73,3043.7 5591.73,2978.27 5610,2960 5610,2780 5585,2755 5585,2505 5610,2480 U15.21@5610,2406.73
RAM_ADDR13: J8.35 U14.29 U15.29 | length 659.2
  Top Layer w7.87: U15.29@5210,2406.73 5210,2475 5235,2500 5235,2685 5210,2710 5210,2970 5213.78,2973.78 J8.35@5213.78,3043.7
RAM_ADDR14: J8.31 U14.30 U15.30 | length 661.5
  Top Layer w7.87: J8.31@5150.79,3043.7 5150.79,2979.21 5160,2970 5160,2710 5185,2685 5185,2505 5160,2480 U15.30@5160,2406.73
RAM_ADDR15: J8.27 U14.31 U15.31 | length 666.9
  Top Layer w7.87: J8.27@5087.79,3043.7 5087.79,2972.21 5110,2950 5110,2710 5135,2685 5135,2505 5110,2480 U15.31@5110,2406.73
RAM_ADDR16: J8.23 U14.32 U15.32 | length 672.3
  Top Layer w7.87: J8.23@5024.8,3043.7 5024.8,2975.2 5060,2940 5060,2710 5085,2685 5085,2505 5060,2480 U15.32@5060,2406.73
RAM_CS: J8.37 R59.2 U14.5 U15.5 | length 1219
  Top Layer w7.87: R59.2@5105,1997.4 5105,2035 5120,2050 5245,2050 5260,2065 5260,2265 5235,2290 5235,2475 5260,2500 5260,2685 5235,2710 5235,2965 5245.28,2975.28 J8.37@5245.28,3043.7
RED0: J8.6 R10.1 | length 3414.2
  Top Layer w7.87: R10.1@3320,5562.6 3320,5375 3305,5360 3305,4915 3396,4824 3396,3804 3744,3456 4609,3456 4741.34,3323.66 J8.6@4741.34,3256.3
RED1: J8.8 R11.1 | length 3454.2
  Top Layer w7.87: R11.1@3410,5562.6 3410,5440 3321,5351 3321,4924 3412,4833 3412,3813 3753,3472 4623,3472 4772.83,3322.17 J8.8@4772.83,3256.3
RED#: D1.3 J3.1 R10.2 R11.2 | length 552.4
  Top Layer w7.87: R10.2@3319.9,5637.4 3409.9,5637.4 3409.9,5694.1 3397.31,5706.69 D1.3@3375,5706.69 3375,5860 3465,5950 J3.1@3550,5950
REF_CLK: J9.4 R52.2 R54.2 U8.129 | length 3262.1
  Top Layer w7.87: v1(4709,1336) 4709,1257.14 J9.4@4709.84,1256.3 ; R54.2@4802.4,2245 4850,2245 ; R52.2@4802.4,2425 4835,2425 4850,2410 4850,2215 v2(4870,2195) ; v1(4840,4065) 4870,4065 4905.79,4100.79 U8.129@5082.68,4100.79
  Bottom Layer w7.87: v1(4709,1336) 4870,1497 v2(4870,2195) ; v1(4840,4065) 4840,2440 4850,2430 v1(4850,2395)
RTS: J1.8 U1.7 | length 492.2
  Top Layer w7.87: U1.7@1225,5722.64 1225,5796 1200,5821 1200,5983 1254.53,6037.53 J1.8@1254.53,6181.89
RX: J1.3 U1.13 | length 212
  Top Layer w7.87: U1.13@1075,5927.36 1075,5975 1125,6025 1154.92,6025 J1.3@1200,6070.08
SCL: HDR8.3 J9.5 R78.1 R79.2 | length 1912.8
  Top Layer w7.87: R78.1@3872.4,815 R79.2@3987.6,815 3987.6,772.4 4025,735 4685,735 4741.34,791.34 J9.5@4741.34,1043.7
  Bottom Layer w7.87: HDR8.3@3350,600 3400,650 3400,720 3495,815 v1(3930,815)
SCL#: R78.2 U20.2 U21.5 | length 663.5
  Top Layer w7.87: U20.2@3403.43,850.31 3439.69,850.31 3451,839 3451,809 3478,782 3582,782 3606,806 3606,876 3618,888 3678,888 3695,905 3720,905 3735,890 3735,830 3750,815 R78.2@3797.6,815 ; 3708.39,905 U21.5@3708.39,964.06
SDA: HDR8.4 J9.3 R76.1 R77.2 | length 1910.8
  Top Layer w7.87: R76.1@3872.4,905 R77.2@3987.6,905 3987.6,870.4 3998,860 4018,860 4025,853 4025,765 4039,751 4676,751 4709.84,784.84 J9.3@4709.84,1043.7
  Bottom Layer w7.87: HDR8.4@3350,700 3481,831 3856,831 v1(3930,905)
SDA#: R76.2 U20.5 U21.6 | length 741.5
  Top Layer w7.87: U20.5@3403.43,909.37 3440.63,909.37 3467,883 3467,818 3487,798 3573,798 3590,815 3590,885 3609,904 3669,904 3682.8,917.8 3682.8,997.8 3695,1010 3720,1010 3735,995 3735,920 3750,905 R76.2@3797.6,905
SLAVE: R6.1 U8.69 | length 2752.6
  Top Layer w7.87: U8.69@5917.32,4435.43 5955.43,4435.43 6206,4686 6556,4686 6664,4794 6969,4794 7004,4829 7004,5659 7109,5764 7464,5764 7490,5790 R6.1@7490,5922.6
SLAVE#: HDR4.10 R6.2 R20.2 | length 1173.8
  Top Layer w7.87: R20.2@7400,5562.6 7400,5525 7420,5505 7725,5505 7760,5540 7760,5965 7727.6,5997.4 R6.2@7490,5997.4 ; 7700,5505 HDR4.10@7700,5550
SLAVE_MODE: HDR4.6 U8.65 | length 2848.9
  Top Layer w7.87: U8.65@5917.32,4356.69 6061.69,4356.69 6151,4446 6416,4446 6700,4730 7010,4730 7068,4788 7068,5623 7145,5700 7650,5700 HDR4.6@7700,5750
SLAVE_TCK: HDR4.3 RA13.7 | length 2244.9
  Top Layer w7.87: RA13.7@6362,4600 6520,4600 6682,4762 6992,4762 7036,4806 7036,5641 7127,5732 7482,5732 HDR4.3@7600,5850
SLAVE_TCK#: RA13.2 U8.67 | length 405.2
  Top Layer w7.87: U8.67@5917.32,4396.06 5966.06,4396.06 6170,4600 RA13.2@6238,4600
SLAVE_TDI: HDR4.1 RA13.8 | length 2333
  Top Layer w7.87: RA13.8@6362,4650 6545,4650 6673,4778 6983,4778 7020,4815 7020,5650 7118,5748 7473,5748 7550,5825 7550,5940 7560,5950 HDR4.1@7600,5950
SLAVE_TDI#: RA13.1 U8.68 | length 417.7
  Top Layer w7.87: U8.68@5917.32,4415.75 5960.75,4415.75 6195,4650 RA13.1@6238,4650
SLAVE_TDO: HDR4.2 R21.2 U8.64 | length 3385.1
  Top Layer w7.87: U8.64@5917.32,4337.01 6067.01,4337.01 6160,4430 6425,4430 6708.42,4713.42 7018.42,4713.42 7084,4779 7084,5614 7154,5684 7526,5684 7550,5660 7550,5580 7532.6,5562.6 R21.2@7490,5562.6 ; 7550,5600 7720,5600 7744,5624 7744,5906 HDR4.2@7700,5950
SLAVE_TMS: HDR4.4 RA13.6 | length 2365.6
  Top Layer w7.87: RA13.6@6362,4550 6495,4550 6691,4746 7001,4746 7052,4797 7052,5632 7136,5716 7491,5716 7575,5800 7650,5800 HDR4.4@7700,5850
SLAVE_TMS#: RA13.3 U8.66 | length 392.6
  Top Layer w7.87: U8.66@5917.32,4376.38 5971.38,4376.38 6145,4550 RA13.3@6238,4550
SPARTAN_M0: JP3.1 R40.2 U8.35 | length 820.3
  Top Layer w7.87: U8.35@5824.8,3732.68 5824.8,3680.2 5860,3645 v1(5935,3645) ; R40.2@6152.4,4060 JP3.1@6250,4060
  Bottom Layer w7.87: v1(5935,3645) 6250,3960 JP3.1@6250,4060
SPI_CLK: J8.46 U8.12 | length 476.7
  Top Layer w7.87: J8.46@5371.26,3256.3 5371.26,3321.26 5372.05,3322.05 U8.12@5372.05,3732.68
SPI_DIN: J8.44 U8.11 | length 481.6
  Top Layer w7.87: J8.44@5339.76,3256.3 5339.76,3324.76 5352.36,3337.36 U8.11@5352.36,3732.68
SPI_DOUT: J8.50 U8.14 | length 485.8
  Top Layer w7.87: U8.14@5411.42,3732.68 5411.42,3348.58 5434.25,3325.75 J8.50@5434.25,3256.3
SPI_MODE: J8.52 U8.15 | length 490.7
  Top Layer w7.87: U8.15@5431.1,3732.68 5431.1,3353.9 5465.75,3319.25 J8.52@5465.75,3256.3
SPI_SEL: J8.48 U8.13 | length 480.9
  Top Layer w7.87: U8.13@5391.73,3732.68 5391.73,3343.27 5402.76,3332.24 J8.48@5402.76,3256.3
SPL1: RA14.1 U8.63 | length 344.6
  Top Layer w7.87: U8.63@5917.32,4317.32 6072.32,4317.32 6130,4375 RA14.1@6238,4375
SPL1#: LED9.1 RA14.8 | length 431.7
  Top Layer w7.87: RA14.8@6362,4375 6420,4375 6640,4595 LED9.1@6702.6,4595
SPL2: RA14.2 U8.60 | length 348.3
  Top Layer w7.87: U8.60@5917.32,4258.27 6138.27,4258.27 6205,4325 RA14.2@6238,4325
SPL2#: LED10.1 RA14.7 | length 411
  Top Layer w7.87: RA14.7@6362,4325 6420,4325 6590,4495 LED10.1@6702.6,4495
SPL3: RA14.3 U8.59 | length 335.8
  Top Layer w7.87: U8.59@5917.32,4238.58 6143.58,4238.58 6180,4275 RA14.3@6238,4275
SPL3#: LED11.1 RA14.6 | length 390.3
  Top Layer w7.87: RA14.6@6362,4275 6425,4275 6545,4395 LED11.1@6702.6,4395
SPL4: RA14.4 U8.58 | length 323.2
  Top Layer w7.87: U8.58@5917.32,4218.9 6148.9,4218.9 6155,4225 RA14.4@6238,4225
SPL4#: LED12.1 RA14.5 | length 369.6
  Top Layer w7.87: RA14.5@6362,4225 6430,4225 6500,4295 LED12.1@6702.6,4295
SPL5: RA15.1 U8.57 | length 517.8
  Top Layer w7.87: U8.57@5917.32,4199.21 6005.79,4199.21 6046,4159 6046,4034 6180,3900 RA15.1@6238,3900
SPL5#: LED13.1 RA15.8 | length 483.3
  Top Layer w7.87: RA15.8@6362,3900 6395,3900 6630,4135 6630,4170 6655,4195 LED13.1@6702.6,4195
SPL6: RA15.2 U8.56 | length 530.4
  Top Layer w7.87: U8.56@5917.32,4179.53 6000.47,4179.53 6030,4150 6030,4025 6205,3850 RA15.2@6238,3850
SPL6#: LED14.1 RA15.7 | length 442.1
  Top Layer w7.87: RA15.7@6362,3850 6395,3850 6640,4095 LED14.1@6702.6,4095
SPL7: RA15.3 U8.50 | length 443.6
  Top Layer w7.87: U8.50@5917.32,4061.42 5968.58,4061.42 6194,3836 6194,3811 6205,3800 RA15.3@6238,3800
SPL7#: LED15.1 RA15.6 | length 421.4
  Top Layer w7.87: RA15.6@6362,3800 6395,3800 6590,3995 LED15.1@6702.6,3995
SPL8: RA15.4 U8.49 | length 470.8
  Top Layer w7.87: U8.49@5917.32,4041.73 5963.27,4041.73 6178,3827 6178,3777 6205,3750 RA15.4@6238,3750
SPL8#: LED16.1 RA15.5 | length 400.7
  Top Layer w7.87: RA15.5@6362,3750 6395,3750 6540,3895 LED16.1@6702.6,3895
SW0: J9.44 RA21.1 S2.1 | length 2362.7
  Top Layer w7.87: J9.44@5339.76,1256.3 5339.76,1319.76 5630,1610 6545,1610 6599,1556 6936,1556 6965,1585 S2.1@7010,1585 7010,1680 6960,1730 6960,1910 6985,1935 7010,1935 7035,1960 RA21.1@7035,1993
SW1: J9.46 RA21.2 S2.2 | length 2396.7
  Top Layer w7.87: J9.46@5371.26,1256.3 5371.26,1321.26 5644,1594 6536,1594 6590,1540 7065,1540 S2.2@7110,1585 7110,1680 7060,1730 7060,1915 7085,1940 RA21.2@7085,1993
SW2: J9.48 RA21.3 S2.3 | length 2466.1
  Top Layer w7.87: J9.48@5402.76,1256.3 5402.76,1322.76 5658,1578 6527,1578 6581,1524 7149,1524 S2.3@7210,1585 7210,1680 7160,1730 7160,1915 7135,1940 RA21.3@7135,1993
SW3: J9.50 RA21.4 S2.4 | length 2570.9
  Top Layer w7.87: J9.50@5434.25,1256.3 5434.25,1324.25 5672,1562 6518,1562 6572,1508 7233,1508 S2.4@7310,1585 7310,1680 7260,1730 7260,1910 7235,1935 7210,1935 7185,1960 RA21.4@7185,1993
SW4: J9.52 RA22.1 S2.5 | length 2637.3
  Top Layer w7.87: J9.52@5465.75,1256.3 5465.75,1320.75 5691,1546 6509,1546 6563,1492 7317,1492 S2.5@7410,1585 7410,1680 7360,1730 7360,1910 7385,1935 7410,1935 7435,1960 RA22.1@7435,1993
SW5: J9.54 RA22.2 S2.6 | length 2671.3
  Top Layer w7.87: J9.54@5497.24,1256.3 5497.24,1322.24 5705,1530 6500,1530 6554,1476 7401,1476 S2.6@7510,1585 7510,1680 7460,1730 7460,1915 7485,1940 RA22.2@7485,1993
SW6: J9.56 RA22.3 S2.7 | length 2740.7
  Top Layer w7.87: J9.56@5528.74,1256.3 5528.74,1323.74 5719,1514 6491,1514 6545,1460 7485,1460 S2.7@7610,1585 7610,1680 7560,1730 7560,1915 7535,1940 RA22.3@7535,1993
SW7: J9.58 RA22.4 S2.8 | length 2845.5
  Top Layer w7.87: J9.58@5560.24,1256.3 5560.24,1325.24 5733,1498 6482,1498 6536,1444 7569,1444 S2.8@7710,1585 7710,1680 7660,1730 7660,1910 7635,1935 7610,1935 7585,1960 RA22.4@7585,1993
SWC0: J9.18 RA18.1 SW1.3 SW1.4 SW5.3 SW5.4 SW9.3 SW9.4 SW13.3 SW13.4 | length 8157.7
  Top Layer w7.87: SW13.3@835,1210 SW13.4@1115,1210 ; SW9.3@835,1660 SW9.4@1132.48,1660 ; SW5.3@835,2110 SW5.4@1115,2110 ; SW1.3@835,2560 SW1.4@1115,2560 ; v2(1120,3175) RA18.1@1120,3228 ; SW1.4@1132.48,2560 1132.48,2607.48 1192,2667 2538,2667 2634,2571 2634,1913 2663.75,1883.25 3770.65,1883.25 4189.65,1464.25 4837,1464.25 4930.31,1370.94 J9.18@4930.31,1256.3
  Bottom Layer w7.87: v2(890,1210) v2(890,2560) 1120,2790 v2(1120,3175)
  other v2: 890,1660 890,2110
SWC1: J9.16 RA18.2 SW2.3 SW2.4 SW6.3 SW6.4 SW10.3 SW10.4 SW14.3 SW14.4 | length 7669.8
  Top Layer w7.87: v2(1170,3175) RA18.2@1170,3228 ; SW14.3@1285,1210 SW14.4@1565,1210 ; SW10.3@1285,1660 SW10.4@1582.48,1660 ; SW6.3@1285,2110 SW6.4@1565,2110 ; SW2.3@1285,2560 SW2.4@1565,2560 ; SW2.4@1582.48,2560 1582.48,2607.48 1626,2651 2529,2651 2618.25,2561.75 2618.25,1905.75 2657,1867 3764.63,1867 4183.63,1448 4829.82,1448 4898.82,1379 J9.16@4898.82,1256.3
  Bottom Layer w7.87: v2(1170,3175) 1136,3141 1136,2764 v2(1340,2560) v2(1340,1210)
  other v2: 1340,1660 1340,2110
SWC2: J9.14 RA18.3 SW3.3 SW3.4 SW7.3 SW7.4 SW11.3 SW11.4 SW15.3 SW15.4 | length 7316
  Top Layer w7.87: v2(1220,3175) RA18.3@1220,3228 ; SW15.3@1735,1210 SW15.4@2015,1210 ; SW11.3@1735,1660 SW11.4@2032.48,1660 ; SW7.3@1735,2110 SW7.4@2015,2110 ; SW3.3@1735,2560 SW3.4@2015,2560 ; SW3.4@2032.48,2560 2032.48,2607.48 2060,2635 2520,2635 2601,2554 2601,1899 2648.75,1851.25 3758.1,1851.25 4177.1,1432.25 4821.07,1432.25 4867.32,1386 J9.14@4867.32,1256.3
  Bottom Layer w7.87: v2(1220,3175) 1790,2605 v2(1790,1210)
  other v2: 1790,1660 1790,2110 1790,2560
SWC3: J9.6 RA18.4 SW4.3 SW4.4 SW8.3 SW8.4 SW12.3 SW12.4 SW16.3 SW16.4 | length 6855.7
  Top Layer w7.87: v2(1270,3175) RA18.4@1270,3228 ; SW4.3@2167.13,2561.81 SW4.4@2482.48,2561.81 ; SW16.3@2185,1210 SW16.4@2465,1210 ; SW12.3@2185,1660 SW12.4@2465,1660 ; SW8.3@2185,2110 SW8.4@2465,2110 ; SW16.4@2482.48,1211.81 2583.81,1211.81 2641,1269 2641,1752 2674.5,1785.5 3734.77,1785.5 4154.27,1366 4733,1366 4741.34,1357.66 J9.6@4741.34,1256.3
  Bottom Layer w7.87: v2(1270,3175) 1270,3150 1860,2560 v2(2240,2560) v2(2240,1210)
  other v2: 2240,1660 2240,2110